# Altium PCB roverServoController.PcbDoc
Units mm, origin at the board's own origin, x right, y up, seen from the top; angles counter-clockwise.
Board outline 60.2 x 40.2 mm, 4 copper layers (Top Layer, Int1 (GND), Int2 (PWR), Bottom Layer), stack 1.585 mm thick; 64 components, 36 nets, 257 pads, 1 vias.
Unrouted connection lines stored in the file: 161.
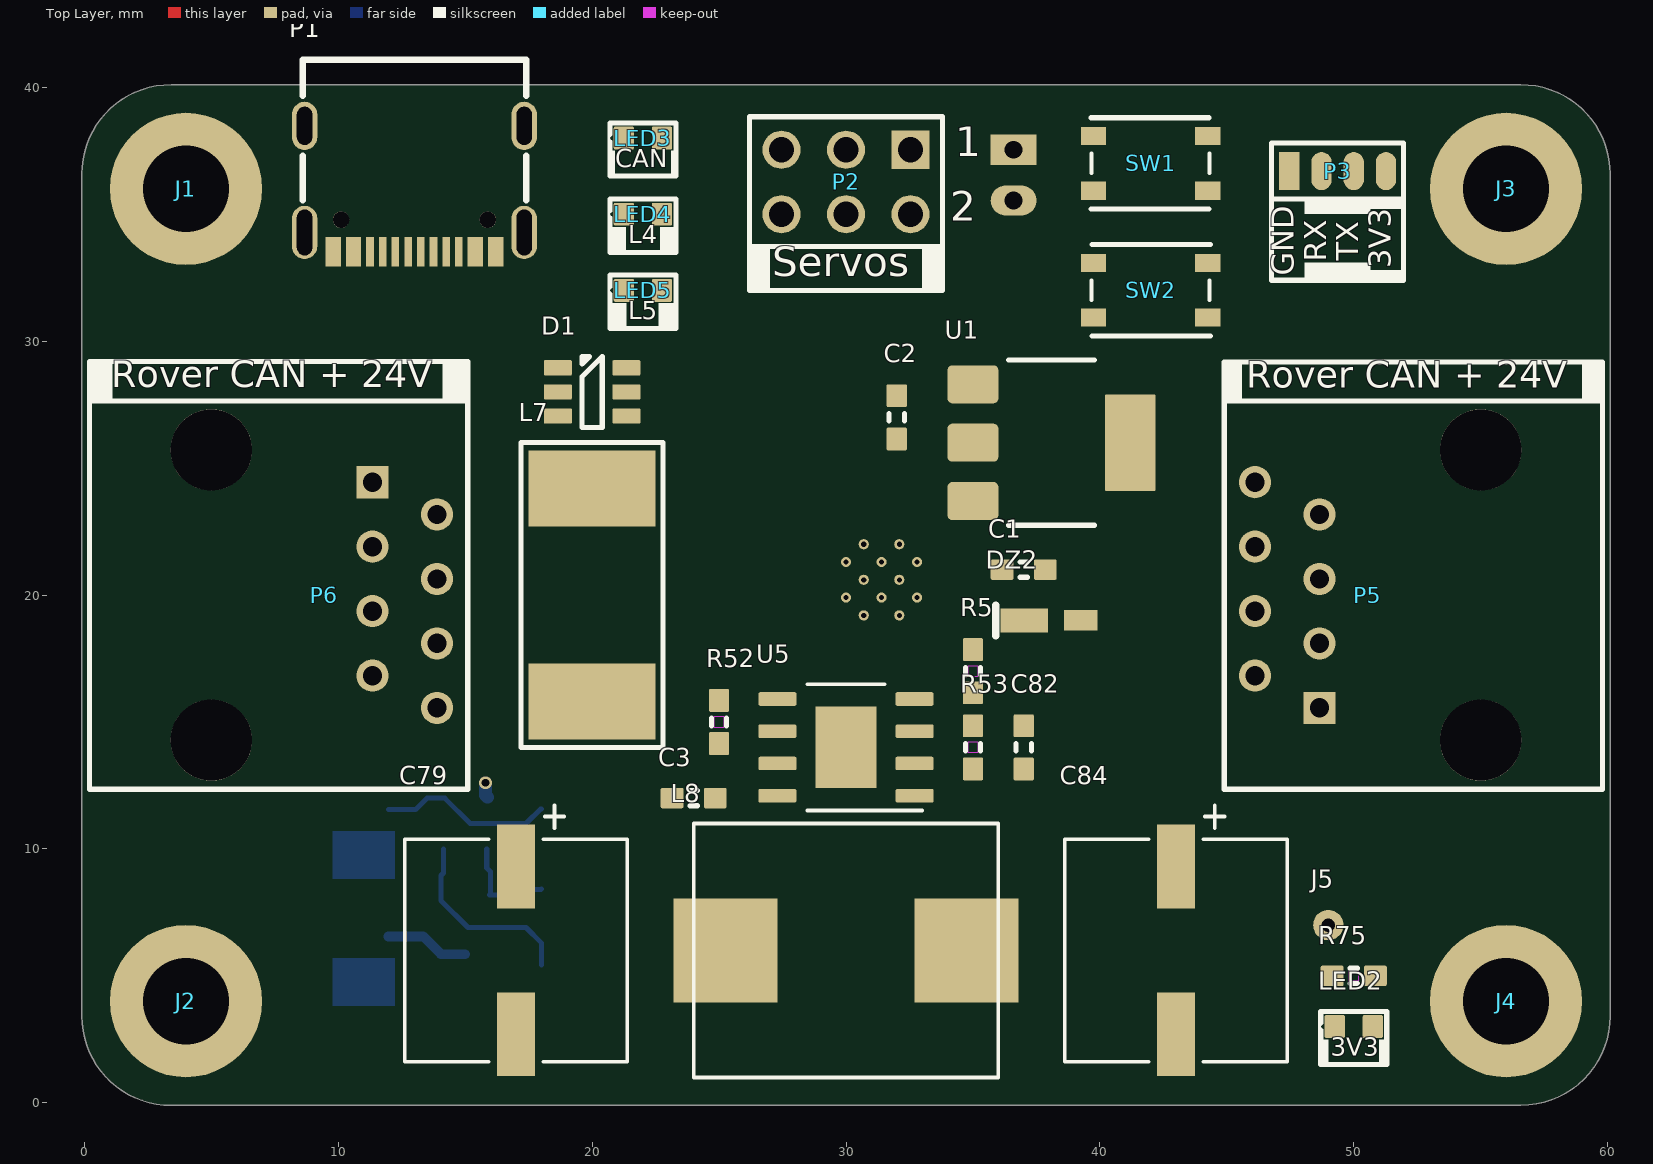
[diagram p0: Top Layer view]
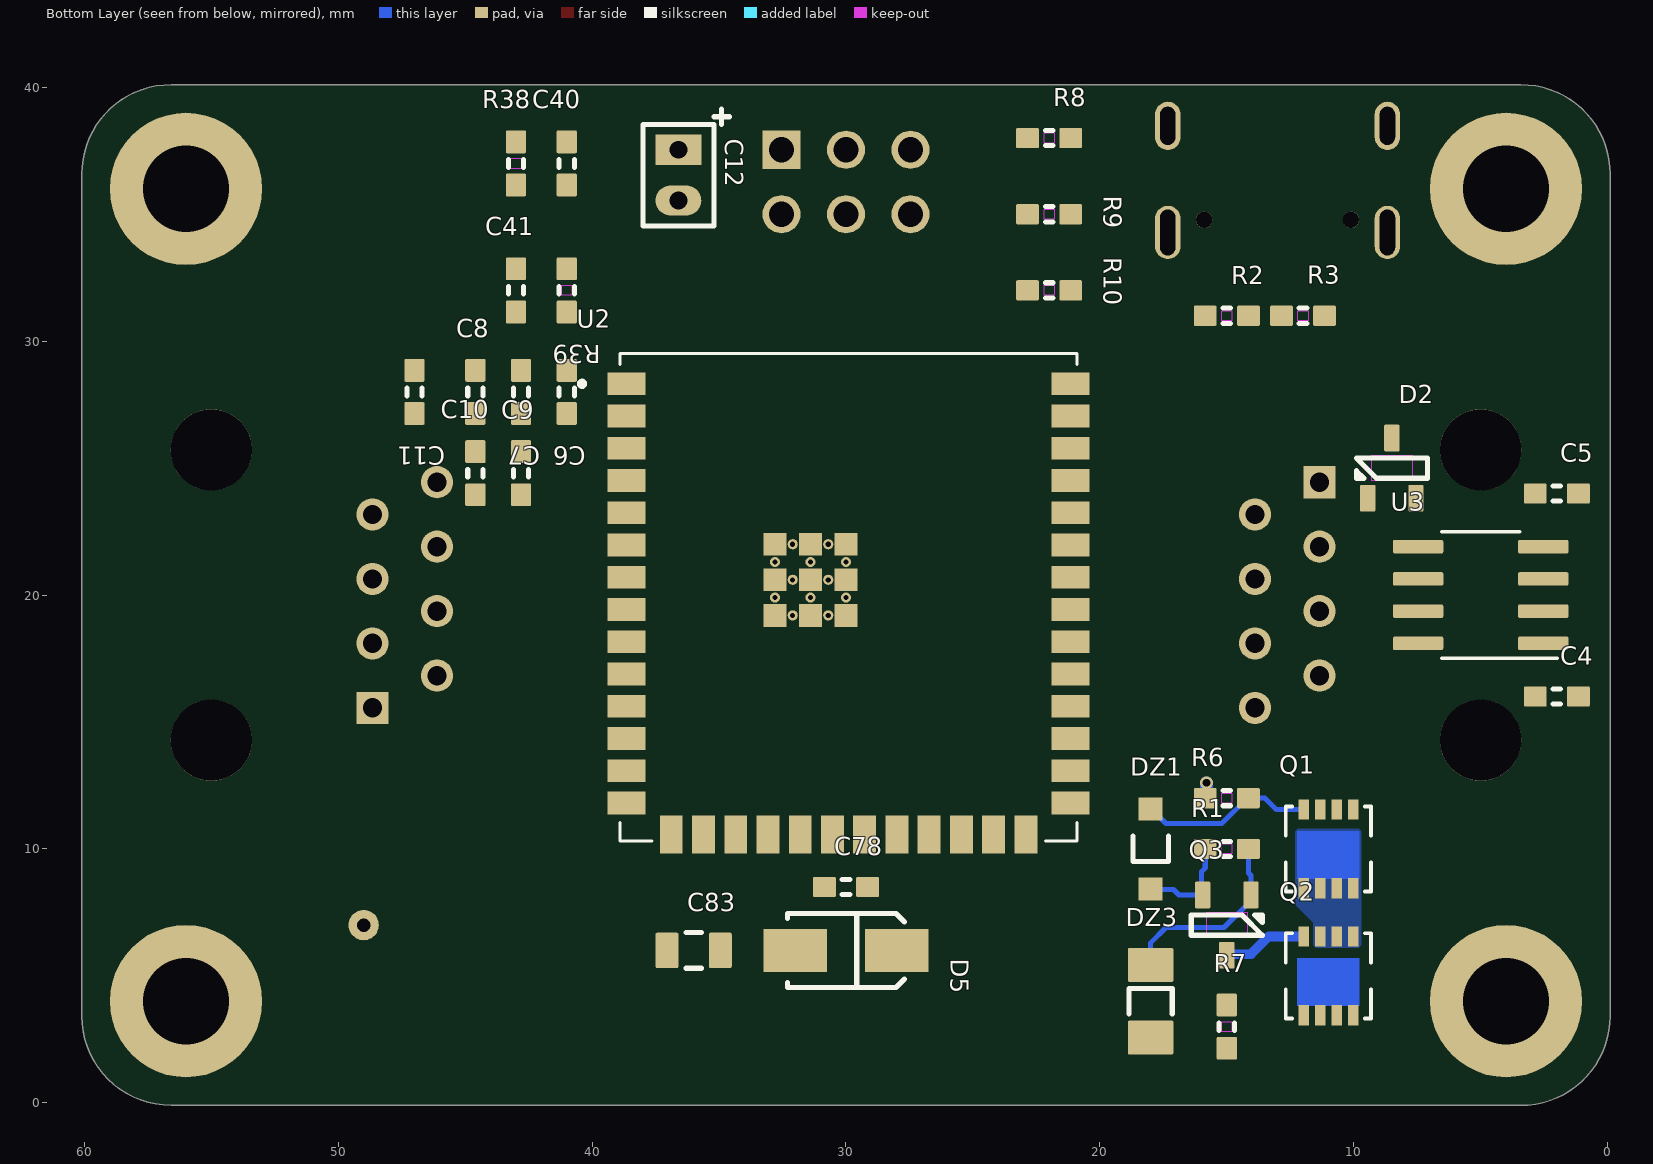
[diagram p1: Bottom Layer view, seen from below]

## Layer stack, top to bottom
Top Solder: solder mask 0.035, SM-001, Dk 4
Top Layer: signal copper 0.035
Dielectric 2: prepreg 0.21, PP-017, Dk 4.6
Int1 (GND): signal copper 0.015
Dielectric 3: core 1.065, Core-039, Dk 4.6
Int2 (PWR): signal copper 0.015
Dielectric 4: prepreg 0.21, PP-017, Dk 4.6
Bottom Layer: signal copper 0.035
Bottom Solder: solder mask 0.035, SM-001, Dk 4

## Board outline
-0.1,3.414 -0.1,36.586 cw(c3.414,36.586) 3.414,40.1 56.586,40.1 cw(c56.586,36.586) 60.1,36.586 60.1,3.414 cw(c56.586,3.414) 56.586,-0.1 4,-0.1 3.414,-0.1 cw(c3.414,3.414)

## Design rules (kind name [scope] priority, off if disabled: settings)
Clearance Clearance_Power [InNetClass('Power')] p1: gap=0.127 ignorepadtopadclearanceinfootprint=FALSE
Clearance Clearance_signal [All] p2: gap=0.125 ignorepadtopadclearanceinfootprint=FALSE
ComponentClearance [All] p1 off: gap=0.254 collisioncheckmode=3 verticalgap=0.254 showdistances=FALSE
DiffPairsRouting eth_100 [Not InDifferentialPair('USB')] p1: maxlimit=0.254 minlimit=0.127 mostfreqgap=0.254 toplayer_maxgap=0.127 toplayer_prefgap=0.127 toplayer_minwidth=0.125 toplayer_maxwidth=0.125 toplayer_prefwidth=0.125 bottomlayer_maxgap=0.127 bottomlayer_prefgap=0.127 bottomlayer_minwidth=0.125 bottomlayer_maxwidth=0.125 bottomlayer_prefwidth=0.125 impedanceprofiledriven=TRUE impedanceprofileid={BED762A8-9934-435E-9BAB-1C0AACEE0ECA} impedanceprofilevalue=100.000000 maxuncoupledlength=12.7
DiffPairsRouting USB_diff [InDifferentialPair('USB') or InDifferentialPair('USB_ESP')] p2: maxlimit=0.254 minlimit=0.127 mostfreqgap=0.254 toplayer_maxgap=0.127 toplayer_prefgap=0.127 toplayer_minwidth=0.182 toplayer_maxwidth=0.182 toplayer_prefwidth=0.182 bottomlayer_maxgap=0.127 bottomlayer_prefgap=0.127 bottomlayer_minwidth=0.182 bottomlayer_maxwidth=0.182 bottomlayer_prefwidth=0.182 impedanceprofiledriven=TRUE impedanceprofileid={FA6609CF-BA32-4F74-B84B-CE5609EF71AF} impedanceprofilevalue=90.000000 maxuncoupledlength=12.7
HoleSize [All] p1 off: absolutevalues=TRUE maxlimit=2.54 minlimit=0.025 maxpercent=80.000 minpercent=20.000
MinimumSolderMaskSliver [All] p1 off: minsoldermaskwidth=0.254
PasteMaskExpansion [All] p1 off: expansion=0
PolygonConnect PolygonConnect_Power [InNetClass('Power')] p1: connectstyle=Direct reliefconductorwidth=0.254 reliefentries=4 polygonreliefangle="90 Angle" airgapwidth=0.254
PolygonConnect PolygonConnectGND [All vs InNet('GND') AND IsNamedPolygon('GND_L01_Plane')] p2: thpad.connectstyle=Relief thpad.reliefconductorwidth=0.4 thpad.reliefentries=4 thpad.polygonreliefangle="90 Angle" thpad.airgapwidth=0.18 smdpad.connectstyle=Relief smdpad.reliefconductorwidth=0.4 smdpad.reliefentries=4 smdpad.polygonreliefangle="90 Angle" smdpad.airgapwidth=0.18 via.connectstyle=Direct via.reliefconductorwidth=0.254 via.reliefentries=4 via.polygonreliefangle="90 Angle" via.airgapwidth=0.254
PolygonConnect [All] p3: connectstyle=Direct reliefconductorwidth=0.254 reliefentries=4 polygonreliefangle="90 Angle" airgapwidth=0.254
RoutingVias [All] p1: holewidth=0.3 width=0.5 viastyle="Through Hole" minholewidth=0.15 minwidth=0.25 maxholewidth=1 maxwidth=1.3
SilkToSolderMaskClearance [IsPad] p1 off: minsilkscreentomaskgap=0.254 clearancetoexposedcopper=TRUE
SolderMaskExpansion [All] p1 off: expansion=0.102 istentingtop=FALSE
Width Width_Power(5A) [InNetClass('Power')] p1: maxlimit=2 minlimit=0.2 preferedwidth=1.25
Width Width_signal [All] p2: maxlimit=1 minlimit=0.1 preferedwidth=0.2 minimp=50.000000 maximp=50.000000 favimp=50.000000
24 further rules are at their usual default settings.

## Classes and differential pairs
component class Power: C1 C2 C3 C78 C79 C82 C83 C84 D5 DZ1 DZ2 DZ3 J5 L7 L8 LED2 P5 P6 Q1 Q2 Q3 R1 R5 R6 R7 R52 R53 R75 U1 U5
component class ESP32: C4 C5 C6 C7 C8 C9 C10 C11 C12 C40 C41 D1 D2 J1 J2 J3 J4 LED3 LED4 LED5 P1 P2 P3 R2 R3 R8 R9 R10 R38 R39 SW1 SW2 U2 U3
net class Power: 5V 24V NetC78_1 NetDZ1_2 NetL7_2

## Components (designator, comment, footprint, x,y, rotation, side; value= is the part's Value field where it differs from the comment)
C1 "Capacitor-0603-10uF-10V-X5R" CAPACITOR-0603 37,21 r180 top value=10uF
C2 "Capacitor-0603-10uF-10V-X5R" CAPACITOR-0603 32,27 r270 top value=10uF
C3 "Capacitor-0603-0.1uF-50V-X7R" CAPACITOR-0603 24,12 r0 top value=0.1uF
C4 "Capacitor-0603-0.1uF-50V-X7R" CAPACITOR-0603 2,16 r180 bottom value=0.1uF
C5 "Capacitor-0603-10uF-10V-X5R" CAPACITOR-0603 2,24 r180 bottom value=10uF
C6 "Capacitor-0603-0.1uF-50V-X7R" CAPACITOR-0603 41,28 r270 bottom value=0.1uF
C7 "Capacitor-0603-0.1uF-50V-X7R" CAPACITOR-0603 42.8,28 r270 bottom value=0.1uF
C8 "Capacitor-0603-0.1uF-50V-X7R" CAPACITOR-0603 44.6,28 r270 bottom value=0.1uF
C9 "Capacitor-0603-10uF-10V-X5R" CAPACITOR-0603 42.8,24.8 r90 bottom value=10uF
C10 "Capacitor-0603-10uF-10V-X5R" CAPACITOR-0603 44.6,24.8 r90 bottom value=10uF
C11 "Capacitor-0603-10uF-10V-X5R" CAPACITOR-0603 47,28 r270 bottom value=10uF
C12 "CAP ALUM 100UF 20% 25V RADIAL SIDE" "CAPACITOR-Aluminium-5x11mm-2mmPitch - SIDE" 36.6,36.54 r180 bottom value=100uF
C40 "Capacitor-0603-1uF-25V-X5R" CAPACITOR-0603 41,37 r270 bottom value=1uF
C41 "Capacitor-0603-0.1uF-50V-X7R" CAPACITOR-0603 43,32 r90 bottom value=0.1uF
C78 "Capacitor-0603-10nF-50V-X7R" CAPACITOR-0603 30,8.5 r0 bottom value=10nF
C79 "CAP ALUM 100UF 20% 25V SMD" CAP_J-V_8X10P5_RUB 17,6 r270 top value=100uF
C82 "Capacitor-0603-82pF-50V-C0G" CAPACITOR-0603 37,14 r270 top value=82pF
C83 "Capacitor-0805-22uF-25V-X5R" CAPACITOR-0805 36,6 r0 bottom value=22uF
C84 "CAP ALUM 220UF 20% 35V SMD" CAP_J-V_8X10P5_RUB 43,6 r270 top value=220uF
D1 "NUP4301MR6T1G" SOT-23-6 20,28 r270 top
D2 "ESDCAN24-2BLY" SOT-23-3 8.5,25 r180 bottom
D5 "CDBA540-HF" SMA/DO-214AC 30,6 r180 bottom
DZ1 "BZT52C6V2-TP" SOD-123 18,10 r270 bottom
DZ2 "MSS1P3L-M3/89A" DO-219AD 38,19 r0 top
DZ3 "MMSZ5254B-TP" SOD-123F 18,4 r90 bottom
J1 "hole" HOLE-3.40MM-M3-8MMEYELET 4,36 r0 top
J2 "hole" HOLE-3.40MM-M3-8MMEYELET 4,4 r0 top
J3 "hole" HOLE-3.40MM-M3-8MMEYELET 56,36 r0 top
J4 "hole" HOLE-3.40MM-M3-8MMEYELET 56,4 r0 top
J5 "hole" HOLE-0.53MM 49,7 r0 top
L7 "3404.2419.11" 2-SMD-Fuse 20,20 r270 top
L8 "104CDMCCDS-220MC" "Inductor_22UH 5A" 30,6 r0 top value=22uH
LED2 "3147-B1911NG--20D000214U1930CT-ND" LED-0603-2PIN-SILKSCREEN 50,3 r0 top
LED3 "3147-B1931NB--20C007614U1930CT-ND" LED-0603-2PIN-SILKSCREEN 22,38 r0 top
LED4 "3147-B1931NB--20C007614U1930CT-ND" LED-0603-2PIN-SILKSCREEN 22,35 r0 top
LED5 "3147-B1931NB--20C007614U1930CT-ND" LED-0603-2PIN-SILKSCREEN 22,32 r0 top
P1 "USB4105-GF-A" USB-C 13,36 r180 top
P2 "6pos-TH-2.54mm" HDR2X3 30,37.54 r180 top
P3 "4pos-SMD-1.27mm" HDR1X4-SMD-50mils 49.365,36.7 r0 top
P5 "RJ45 UnShield" AMPHENOL_54602-908LF 55,20 r90 top
P6 "RJ45 UnShield" AMPHENOL_54602-908LF 5,20 r270 top
Q1 "AONR21307" DFN8_3x3_Power 11,10 r270 bottom
Q2 "AONR21307" DFN8_3x3_Power 11,5 r270 bottom
Q3 "SSM3J332R" SOT-23-3 15,7 r0 bottom
R1 "SMT resistor" Resistor-0603 15,10 r0 bottom value=10k
R2 "Resistor-0603-5.1k" RESISTOR-0603 15,31 r0 bottom value=DNI
R3 "Resistor-0603-5.1k" RESISTOR-0603 12,31 r180 bottom value=DNI
R5 "SMT resistor" Resistor-0603 35,17 r270 top value=31.6k
R6 "SMT resistor" Resistor-0603 15,12 r180 bottom value=10k
R7 "SMT resistor" Resistor-0603 15,3 r90 bottom value=10k
R8 "SMT resistor" Resistor-0603 22,38 r180 bottom value=1k
R9 "SMT resistor" Resistor-0603 22,35 r180 bottom value=1k
R10 "SMT resistor" Resistor-0603 22,32 r180 bottom value=1k
R38 "SMT resistor" Resistor-0603 43,37 r90 bottom value=10k
R39 "SMT resistor" Resistor-0603 41,32 r270 bottom value=10k
R52 "SMT resistor" Resistor-0603 25,15 r270 top value=10k
R53 "SMT resistor" Resistor-0603 35,14 r270 top value=100k
R75 "SMT resistor" Resistor-0603 50,5 r180 top value=1k
SW1 "PTS815 SJM 250 SMTR LFS" "SW4_PTS815 SJM 250 SMTR LFS_CNK" 42,37 r270 top
SW2 "PTS815 SJM 250 SMTR LFS" "SW4_PTS815 SJM 250 SMTR LFS_CNK" 42,32 r90 top
U1 "NCV1117ST33T3G" SOT-223-3/TO-261-3S 35,26 r270 top
U2 "ESP32-S3-WROOM-1U" ESP32-S3-WROOM-1U 29.9,19.91 r180 bottom
U3 "SN65HVD232DR" SOIC-8 5,20 r90 bottom
U5 "RT6285GSP" SOIC-8-EXPOSED-PAD 30,14 r90 top

## Footprints (in the part's own frame and the unit in brackets; to place one, negate y for a bottom-side part, rotate by r counter-clockwise, add the part's x,y. Pads: shape width x height; smd on the part's side, far side on the other; paste and mask are expansions set on the pad)
2-SMD-Fuse [mm]
  rect 3x5 smd: 1(-4.2,0) 2(4.2,0)
  silkscreen extent -6,-2.8 6,2.8, body extent -5.6,-2.09 5.7,2.11, height 4.02
AMPHENOL_54602-908LF [mm] "RJ45"
  rect 1.268x1.268 / inner round 1.268 / far side rect 1.268x1.268 hole 0.76: 1(-4.445,6.35)
  round 1.268 hole 0.76: 2(-3.175,8.89) 3(-1.905,6.35) 4(-0.635,8.89) 5(0.635,6.35) 6(1.905,8.89) 7(3.175,6.35) 8(4.445,8.89)
  round 3.2 hole 3.2 unplated: ""(-5.715,0) ""(5.715,0)
  silkscreen extent -7.65,-4.8 7.65,10.1, body extent -7.65,-7.62 7.65,10.12, height 12.7
CAP_J-V_8X10P5_RUB [mil]
  rect 130x59 smd paste+0: 1(-130,0) 2(130,0)
  silkscreen extent -225,-173 173,173, body extent -175,-167 175,167, height 415
CAPACITOR-0603 [mm] "Metric 1608, EIA 0603. Per Yageo Product Specification V2.2"
  rrect15% 0.9x0.8 smd: 1(-0.85,0) 2(0.85,0)
  Top Layer pour cut-out: -0.2,0.2 0.2,0.2 0.2,-0.2 -0.2,-0.2
  silkscreen extent -0.15,-0.3 0.15,0.3, body extent -0.93,-0.41 0.93,0.41, height 0.81
CAPACITOR-0805 [mm] "Metric 2012, EIA 0805, Per Yageo Product Specification V2.2"
  rrect15% 0.9x1.4 smd: 1(-1.05,0) 2(1.05,0)
  silkscreen extent -0.3,-0.7 0.3,0.7, body extent -1.09,-0.64 1.09,0.64, height 1.26
"CAPACITOR-Aluminium-5x11mm-2mmPitch - SIDE" [mm] "5mm dia x 11mm height Capacitor"
  rect 1.8x1.2 hole 0.7: 1(0,1)
  oval 1.8x1.2 hole 0.7: 2(0,-1)
  silkscreen extent -1.4,-2 2,2.6, body extent -15.15,-2.69 0.15,2.8, height 6.35
DFN8_3x3_Power [mm]
  rect 0.8x0.42 smd paste+0 mask+0: 1(-1.549,0.975) 2(-1.549,0.325) 3(-1.549,-0.325) 4(-1.549,-0.975)
  rect 0.813x0.42 smd paste+0 mask+0: 5(1.549,-0.975) 6(1.549,-0.325) 7(1.549,0.325) 8(1.549,0.975)
  Top Layer region: -0.686,-1.219 -0.686,1.219 1.182,1.219 1.182,-1.219
  silkscreen extent -1.68,-1.68 1.68,1.68, body extent -1.58,-1.58 1.58,1.58, height 0.75
DO-219AD [mil]
  rect 73x37 smd paste+0 mask+0: 1(-38.5,0)
  rect 52x32 smd paste+0 mask+0: 2(49,0)
  silkscreen extent -83,-24 -83,24, body extent -53,-27 53,27, height 29
ESP32-S3-WROOM-1U [mm]
  rect 1.5x0.9 smd: 1(-8.75,8.41) 2(-8.75,7.14) 3(-8.75,5.87) 4(-8.75,4.6) 5(-8.75,3.33) 6(-8.75,2.06) 7(-8.75,0.79) 8(-8.75,-0.48) 9(-8.75,-1.75) 10(-8.75,-3.02) 11(-8.75,-4.29) 12(-8.75,-5.56) 13(-8.75,-6.83) 14(-8.75,-8.1) 27(8.75,-8.1) 28(8.75,-6.83) 29(8.75,-5.56) 30(8.75,-4.29) 31(8.75,-3.02) 32(8.75,-1.75) 33(8.75,-0.48) 34(8.75,0.79) 35(8.75,2.06) 36(8.75,3.33) 37(8.75,4.6) 38(8.75,5.87) 39(8.75,7.14) 40(8.75,8.41)
  rect 0.9x1.5 smd: 15(-6.985,-9.35) 16(-5.715,-9.35) 17(-4.445,-9.35) 18(-3.175,-9.35) 19(-1.905,-9.35) 20(-0.635,-9.35) 21(0.635,-9.35) 22(1.905,-9.35) 23(3.175,-9.35) 24(4.445,-9.35) 25(5.715,-9.35) 26(6.985,-9.35)
  rect 0.9x0.9 smd: 41(-2.9,-0.71) 41(-2.9,0.69) 41(-2.9,2.09) 41(-1.5,-0.71) 41(-1.5,0.69) 41(-1.5,2.09) 41(-0.1,-0.71) 41(-0.1,0.69) 41(-0.1,2.09)
  round 0.4 hole 0.2 mask+0: 41(-2.9,-0.01) 41(-2.9,1.39) 41(-2.2,-0.71) 41(-2.2,0.69) 41(-2.2,2.09) 41(-1.5,-0.01) 41(-1.5,1.39) 41(-0.8,-0.71) 41(-0.8,0.69) 41(-0.8,2.09) 41(-0.1,-0.01) 41(-0.1,1.39)
  silkscreen extent -10.6,-9.6 9,9.6, body extent -9,-9.6 9,9.6, height 3.35
HDR1X4-SMD-50mils [mm] "Connector; Header; 4 Positions 50mils"
  rect 0.8x1.5 smd: 1(-1.905,0)
  oval 0.8x1.5 smd: 2(-0.635,0) 3(0.635,0) 4(1.905,0)
  silkscreen extent -2.6,-1.1 2.6,1.1
HDR2X3 [mm] "Connector; Header; 2 Position"
  rect 1.5x1.5 hole 1: 1(-2.54,0)
  round 1.5 hole 1: 2(0,0) 3(2.54,0) 4(2.54,2.54) 5(0,2.54) 6(-2.54,2.54)
  silkscreen extent -3.8,-1.3 3.8,3.81, body extent -3.81,-10.94 3.81,2.82, height 5.54
HOLE-0.53MM [mm] "Hole 0.53mm"
  round 1.2 hole 0.53: 1(0,0)
HOLE-3.40MM-M3-8MMEYELET [mm] "Hole 3.40mm with round pad for eyelet"
  round 6 hole 3.4: 1(0,0)
"Inductor_22UH 5A" [mm]
  rect 4.1x4.1 smd: 1(-4.75,0) 2(4.75,0)
  silkscreen extent -6,-5 6,5, body extent -5,-5 5,5, height 3.8
LED-0603-2PIN-SILKSCREEN [mm] "Metric 1608, EIA 0603. Per Yageo Product Specification V2.2"
  rrect15% 0.8x0.9 smd: 1(-0.75,0) 2(0.75,0)
  Top Layer pour cut-out: -0.35,0.45 0.35,0.45 0.35,-0.45 -0.35,-0.45
  silkscreen extent -1.35,-1.5 1.3,0.6, body extent -0.8,-0.4 0.8,0.4, height 0.8
Resistor-0603 [mm] "Metric 1608, EIA 0603 Drawn per Yageo \"Chip resistors Mounting\" rev 10"
  rrect15% 0.9x0.8 smd: 1(-0.85,0) 2(0.85,0)
  Top Layer pour cut-out: -0.2,0.2 0.2,0.2 0.2,-0.2 -0.2,-0.2
  Top Layer keep-out region: -0.2,0.2 0.2,0.2 0.2,-0.2 -0.2,-0.2
  silkscreen extent -0.15,-0.3 0.15,0.3, body extent -0.8,-0.4 0.8,0.4, height 0.55
RESISTOR-0603 [mm] "Metric 1608, EIA 0603 Drawn per Yageo \"Chip resistors Mounting\" rev 10"
  rrect15% 0.9x0.8 smd: 1(-0.85,0) 2(0.85,0)
  Top Layer pour cut-out: -0.2,0.2 0.2,0.2 0.2,-0.2 -0.2,-0.2
  Top Layer keep-out region: -0.2,0.2 0.2,0.2 0.2,-0.2 -0.2,-0.2
  silkscreen extent -0.15,-0.3 0.15,0.3, body extent -0.8,-0.4 0.8,0.4, height 0.55
SMA/DO-214AC [mm] "SMA, DO-214AC. From Diode DS19005 rev 16-2"
  rect 2.5x1.7 smd: 1(-2,0) 2(2,0)
  silkscreen extent -2.3,-1.46 2.3,1.46, body extent -2.55,-1.33 2.55,1.33, height 2.08
SOD-123 [mm] "SOD-123. From Diodes DDZ6V2B-7 datasheet"
  rect 0.9x0.95 smd: 1(-1.575,0) 2(1.575,0)
  silkscreen extent -0.5,-0.7 0.5,0.7, body extent -1.85,-0.8 1.85,0.8, height 1.27
SOD-123F [mm] "SOD-123F from https://www.diodes.com/assets/Package-Files/SOD123F.pdf on 2017-03-16"
  rrect10% 1.34x1.8 smd: 1(-1.43,0) 2(1.43,0)
  silkscreen extent -0.5,-0.85 0.5,0.85, body extent -1.85,-0.85 1.9,0.85, height 1.22
SOIC-8 [mil] "8-Lead Plastic Small Outline, 0.15in pitch,  LTC DWG # 05-08-1610 Rev G"
  rrect25% 21x78 smd: 1(-75,-97) 2(-25,-97) 3(25,-97) 4(75,-97) 5(75,97) 6(25,97) 7(-25,97) 8(-75,97)
  silkscreen extent -98,-118 98,60, body extent -98,-122 98,122, height 69
SOIC-8-EXPOSED-PAD [mm] "8-Lead Plastic Small Outline, 0.15in pitch,  LTC DWG # 05-08-1610 Rev G"
  rrect25% 0.533x1.5 smd: 1(-1.905,-2.7) 2(-0.635,-2.7) 3(0.635,-2.7) 4(1.905,-2.7) 5(1.905,2.7) 6(0.635,2.7) 7(-0.635,2.7) 8(-1.905,2.7)
  rect 3.2x2.4 smd: 9(0,0)
  silkscreen extent -2.49,-3 2.49,1.52, body extent -2.5,-3.1 2.5,3.1, height 1.75
SOT-23-3 [mm] "SOT23-3, from TI DBZ (R-PDSO-G3)"
  rrect15% 0.6x1.05 smd: 1(-0.95,-1.185) 2(0.95,-1.185) 3(0,1.185)
  Top Layer keep-out region: -0.8,0.5 0.8,0.5 0.8,-0.5 -0.8,-0.5
  silkscreen extent -1.4,-0.4 1.4,0.4, body extent -1.45,-1.21 1.45,1.21, height 0.98
SOT-23-6 [mm] "SOT23-6, from TI DDC (R-PDSO-G6)"
  rrect15% 0.6x1.1 smd: 1(-0.95,-1.35) 2(0,-1.35) 3(0.95,-1.35) 4(0.95,1.35) 5(0,1.35) 6(-0.95,1.35)
  silkscreen extent -1.4,-0.4 1.4,0.4, body extent -1.5,-1.37 1.5,1.38, height 1.1
SOT-223-3/TO-261-3S [mm] "TO-261-3 / SOT-223-3 from Infineon IPN80R600P7 Datasheet, rev 2,1"
  rrect25% 1.5x2 smd: 1(-2.3,0) 2(0,0) 3(2.3,0)
  rrect5% 3.8x2 smd: 4(0,6.2)
  silkscreen extent -3.25,1.4 3.25,4.78, body extent -3.25,-0.37 3.25,6.57, height 1.64
"SW4_PTS815 SJM 250 SMTR LFS_CNK" [mm]
  rect 0.711x0.991 smd paste+0: 1(1.075,2.25) 2(1.075,-2.25) 3(-1.075,2.25) 4(-1.075,-2.25)
  silkscreen extent -1.8,-2.35 1.8,2.32, body extent -1.83,-2.32 1.83,2.32, height 3
USB-C [mm]
  oval 1x1.9 hole 0.6 slot 1.5 at 90 deg: 13(-4.325,-2.481) 13(4.325,-2.481)
  oval 1x2.1 hole 0.6 slot 1.8 at 90 deg: 13(-4.325,1.719) 13(4.325,1.719)
  rect 0.6x1.15 smd mask+0.08: A1B12(-3.2,2.481) A4B9(-2.4,2.481) B1A12(3.2,2.481) B4A9(2.4,2.481)
  rect 0.3x1.15 smd mask+0.08: A5(-1.25,2.481) A6(-0.25,2.481) A7(0.25,2.481) A8(1.25,2.481) B5(1.75,2.481) B6(0.75,2.481) B7(-0.75,2.481) B8(-1.75,2.481)
  round 0.65 hole 0.65 unplated: ""(-2.89,1.219) ""(2.89,1.219)
  silkscreen extent -4.4,-5.08 4.4,0.44, body extent -4.47,-5.08 4.47,2.52, height 3.28

## Part data
C1 C2 C5 C9 C10 C11: "10 µF ±20% 10V Ceramic Capacitor X5R 0603 (1608 Metric)", Package / Case="Metric 1608 , EIA 0603", Supplier Part Number 1=4713-GMC10X5R106M10NTCT-ND, Volt=10V, Mounted=Yes, Precision=20%, Supplier 1=Digikey
C3 C4 C6 C7 C8 C41: Package / Case="Metric 1608, EIA 0603", Supplier Part Number 1=1276-1935-2-ND, Volt=50V, Mounted=Yes, Precision=X7R-10%, Supplier 1=Digi-Key, Supplier 2=Digi-Key, Supplier Part Number 2=1276-1934-2-ND
C12: library part Capacitor-100uF-25V-Side, "CAP ALUM 100UF 20% 25V RADIAL", Supplier Part Number 1=399-6102-ND, Volt=25V, Mounted=Yes, Precision=20%, Supplier 1=Digi-Key, Supplier 2=Digi-Key
C40: Package / Case="Metric 1608, EIA 0603", Supplier Part Number 1=1276-1859-2-ND, Volt=25V, Mounted=Yes, Precision=X5R-10%, Supplier 1=Digi-Key, Supplier 2=Digi-Key, Supplier Part Number 2=1276-1942-2-ND
C78: Package / Case="Metric 1608 , EIA 0603", Supplier Part Number 1=490-4778-1-ND, Volt=50V, Mounted=Yes, Precision=X7R-10%, Supplier 1=Digikey
C79: library part Capacitor-100uF-50V-SMD, "CAP ALUM 100UF 20% 50V SMD", Supplier Part Number 1=1189-1651-1-ND, Volt=50V, Mounted=Yes, Precision=20%, Supplier 1=Digi-Key, Supplier 2=Digi-Key
C82: Package / Case="Metric 1608, EIA 0603", Supplier Part Number 1=478-KGM15ACG1H820JTCT-ND, Volt=50V, Mounted=Yes, Precision=C0G-5%, Supplier 1=Digi-Key, Supplier 2=Digi-Key
C83: Package / Case="Metric 2012 , EIA 0805", Supplier Part Number 1=490-12389-1-ND, Volt=25V, Mounted=Yes, Precision=X5R-20%, Supplier 1=Digi-Key, Supplier 2=Digi-Key
C84: library part Capacitor-220uF-35V-SMD, Supplier Part Number 1=1189-1651-1-ND, Volt=35V, Mounted=Yes, Precision=20%, Supplier 1=Digi-Key, Supplier 2=Digi-Key
D1: "4CH Clamp Ipp Tvs Diode Surface Mount SOT23-6 (SC74)", Package / Case=SOT23-6, Supplier Part Number 1=NUP4301MR6T1GOSTR-ND, Volt=70, Mounted=Yes, Supplier 1=Digi-Key
D2: "55V Clamp 6A (8/20µs) Ipp Tvs Diode Surface Mount SOT-23", Package / Case=SOT-23-3, Supplier Part Number 1=5272-ESDCAN24-2BLYCT-ND, Volt=24, Mounted=Yes, Supplier 1=Digi-Key
D5: "DIODE SCHOTTKY 40V 5A SMA", Package / Case=SMA, Supplier Part Number 1=641-1707-1-ND, Volt=40V, Mounted=Yes, Supplier 1=Digi-Key
DZ1: "Zener Diode 6.2 V 200 mW ±6% Surface Mount SOD-123", Package / Case=SOD-123, Supplier Part Number 1=BZT52C13-TPMSCT-ND, Volt=6.2V, Grade=None, Mounted=Yes, Precision=6%, Supplier 1=Digi-Key, Watt=200mW
DZ2: "Diode 30 V 1A Surface Mount MicroSMP (DO-219AD)", Package / Case="DO-214AC, SMA", Supplier Part Number 1=MSS1P3L-M3/89AGICT-ND, Volt=30V, Grade=None, Mounted=Yes, Supplier 1=Digi-Key
DZ3: "DIODE ZENER 27V 500MW SOD123", Package / Case=SOD-123, Supplier Part Number 1=MMSZ5254B-TPMSCT-ND, Volt=27V, Grade=None, Mounted=Yes, Precision=5%, Supplier 1=Digi-Key, Watt=0.5W
J1 J2 J3 J4: library part "Hole 3.40mm M3-Eyelet", "Hole for M3 Bolt with 8mm pad", Mounted=N/A
J5: library part "Hole 0.53mm AWG28-Solid", "Hole for 28 AWG Solid Wire", Mounted=N/A
L7: "2 A 277 V AC 250 V DC Fuse Board Mount (Cartridge Style Excluded) Requires Holder, Surface Mount 2-SMD, Square End Block with Clip", Current=2A, Package / Case=SMD, Supplier Part Number 1=486-2091-ND, Mounted=Yes, Supplier 1=Digi-Key
L8: "FIXED IND 22UH 5A 66 MOHM SMD", Current=5A, Package / Case=SMD, Supplier Part Number 1=308-2498-1-ND, Mounted=Yes, Precision=20%, Supplier 1=Digi-Key
LED2: library part LED_GREEN, "LED GREEN DIFFUSED 0603 SMD", Package / Case="0603 (1608 Metric)", Mounted=Yes, Supplier 1=Digi-Key, Supplier Part Number 1=3147-B1911NG--20D000214U1930CT-ND
LED3 LED4 LED5: library part LED_BLUE, "LED BLUE CLEAR 0603 SMD", Package / Case="0603 (1608 Metric)", Mounted=Yes, Supplier 1=Digi-Key, Supplier Part Number 1=3147-B1931NB--20C007614U1930CT-ND
P1: "CONN RCP USB2.0 TYP C 24P SMD RA / 5A", Package / Case=SMD, Supplier Part Number 1=2073-USB4105-GF-ACT-ND, Volt=N/A, Mounted=Yes, Supplier 1=Digikey
P2: library part "6pos-TH-2.54mm 2x3", "6pos TH 2.54mm Header", Package / Case=TH, Supplier Part Number 1=952-2092-ND, Volt=N/A, Mounted=Yes, Supplier 1=Digi-Key
P3: "4pos SMD 1.27mm", Package / Case=TH, Supplier Part Number 1=N/A, Mounted=Yes, Supplier 1=Digi-Key, Volt=N/A
P5 P6: library part RJ545, "Jack Modular Connector 8p8c (RJ45, Ethernet) 90° Angle (Right) Unshielded Cat3", Package / Case=SMD, Supplier Part Number 1=609-1046-ND, Volt=N/A, HelpURL=https://cdn.amphenol-cs.com/media/wysiwyg/files/drawing/c-bmj-0102.pdf, Mounted=Yes, Supplier 1=Digikey
Q1 Q2: "MOSFET P-CH 30V 24A 8DFN", Current=24A, Package / Case="8-DFN-EP (3x3)", Supplier Part Number 1=785-1796-2-ND, Volt=30V, Mounted=Yes, Supplier 1=Digi-Key
Q3: "P-Channel 30 V 6A (Ta) 1W (Ta) Surface Mount SOT-23F", Current=6A, Package / Case=SOT-523, Supplier Part Number 1=SSM3J332RLFCT-ND, Volt=30V, Mounted=Yes, Supplier 1=Digi-Key
R1 R6 R7 R38 R39: library part Resistor0603-10k, "Resistor0603-10k", Package / Case="Metric 1608, EIA 0603", Supplier Part Number 1=311-10.0KHRTR-ND, Mounted=Yes, Precision=1%, Supplier 1=Digi-Key, Supplier 2=Digi-Key, Supplier 3=Digi-Key, Supplier 4=Digi-Key, Supplier Part Number 2=RMCF0603FT10K0TR-ND, Watt=0.1W
R2 R3: library part Resistor-0603-DNI, "0603 footprint DO NOT INSTALL", Package/Case="Metric 1608 , EIA 0603", Mounted=Yes
R5: library part Resistor-0603-31.6k, "Resistor0603-31.6k", Package / Case="Metric 1608, EIA 0603", Supplier Part Number 1=311-31.6KHRCT-ND, Mounted=Yes, Precision=1%, Supplier 1=Digi-Key, Watt=0.1W
R8 R9 R10 R75: library part Resistor-0603-1k, "Resistor0603-1k", Package / Case="Metric 1608, EIA 0603", Supplier Part Number 1=311-1.00KHRCT-ND, Mounted=Yes, Precision=1%, Supplier 1=Digi-Key, Watt=0.1W
R52: library part Resistor-0603-10k, "Resistor0603-10k", Package / Case="Metric 1608, EIA 0603", Supplier Part Number 1=311-10.0KHRTR-ND, Mounted=Yes, Precision=1%, Supplier 1=Digi-Key, Watt=0.1W
R53: library part Resistor-0603-100k, "Resistor0603-100k", Package / Case="Metric 1608, EIA 0603", Supplier Part Number 1=311-100KHRCT-ND, Mounted=Yes, Precision=1%, Supplier 1=Digi-Key, Watt=0.1W
SW1 SW2: "TACT 4.2 X 3.2, 2.5 MM H, 180GF,", Current=0.05A, Supplier Part Number 1=CKN12215-1-ND, Volt=12V, Mounted=Yes, Supplier 1=Digi-Key
U1: "IC REG LINEAR 3.3V 1A SOT223", Package / Case=SOT223, Supplier Part Number 1=NCP1117ST15T3GOSTR-ND, Mounted=Yes, Supplier 1=Digi-Key
U2: "2.4 GHz Wi-Fi (802.11 b/g/n) and Bluetooth 5 (LE) module", Package=Package, Supplier Part Number 1=1965-ESP32-S3-WROOM-1U-N8R8CT-ND, MF="Espressif Systems", MP=ESP32-S3-WROOM-1U, Supplier 1=Digikey
U3: "1/1 Transceiver Half CANbus 8-SOIC", Package / Case=8-SOIC, Supplier Part Number 1=296-26344-1-ND, HelpURL=https://www.ti.com/lit/ds/symlink/sn65hvd230.pdf?HQS=dis-dk-null-digikeymode-dsf-pf-null-wwe&ts=1723930967656&ref_url=https%253A%252F%252Fwww.ti.com%252Fgeneral%252Fdocs%252Fsuppproductinfo.tsp%253FdistId%253D10%2526gotoUrl%253Dhttps%253A%252F%252Fwww.ti.com%252Flit%252Fgpn%252Fsn65hvd230, Mounted=Yes, Supplier 1=Digikey
U5: "5A Buck Switching Regulator IC Positive Adjustable 1.222V 1 Output 5A 8-SOIC (0.154\", 3.90mm Width) Exposed Pad", Package / Case=8-SOIC-EP, Supplier Part Number 1=1028-RT6285GSPCT-ND, Grade=None, HelpURL=file:///C:/Users/Emile/Downloads/DS6285-00.pdf, Mounted=Yes, Supplier 1=Digi-Key

## Via types
v1: diameter 0.5, hole 0.3, Top Layer to Bottom Layer, tented both sides, 1 vias

## Nets (pads, with @x,y where several pads share a name; then routed paths per layer and width w, separated by ;. In a path a pad name is that pad's centre, name@x,y a point inside that pad or via, vN(x,y) a via of type N, cw(c..) or ccw(c..) an arc to the next point about the centre after c; other vN are vias at no path point)
3V3: C2.2 C4.2 C5.2 C6.2 C7.2 C8.2 C9.2 C10.2 C11.2 P3.4 R38.2 R39.2 U1.2 U1.4 U2.2 U3.3
5V: C12.1 C82.2 C83.2 C84.1 DZ2.2 J5.1 L8.2 P2.2 P2.5 R53.2 R75.2
5V_USB: C1.2 D1.5 DZ2.1 P1.A4B9 P1.B4A9 U1.3
24V: C3.2 C79.1 Q2.5 Q2.6 Q2.7 Q2.8 R52.2 U5.7
24V_RAW: L7.1 P5.5 P5.7 P6.5 P6.7
CAN_H: D2.2 P5.1 P6.1 U3.7
CAN_L: D2.1 P5.2 P6.2 U3.6
CAN_LED: R8.2 U2.25
CAN_RX: U2.30 U3.4
CAN_TX: U2.29 U3.1
CC1: D1.4 P1.A5 R2.2
CC2: D1.3 P1.B5 R3.2
EN: C40.2 R38.1 SW1.1 U2.3
GND: C1.1 C2.1 C3.1 C4.1 C5.1 C6.1 C7.1 C8.1 C9.1 C10.1 C11.1 C12.2 C40.1 C41.1 C79.2 C83.1 C84.2 D1.2 D2.3 D5.1 DZ3.1 J1.1 J2.1 J3.1 J4.1 LED2.1 LED3.1 LED4.1 LED5.1 P1.13 P1.A1B12 P1.B1A12 P2.3 P2.4 P3.1 P5.6 P5.8 P6.6 P6.8 R2.1 R3.1 R5.1 R6.1 R7.1 SW1.3 SW2.3 U1.1 U2.1 U2.40 U2.41 U3.2 U5.6 U5.9 | length 0.6
  Bottom Layer w0.4: R6.1 R6.1@15.881,12.031
  Bottom Layer w0.5: v1(15.8,12.6) 15.8,12.112 R6.1@15.881,12.031
IO0: C41.2 R39.1 SW2.1 U2.27
NetC78_1: C78.1 D5.2 L8.1 U5.8
NetC78_2: C78.2 U5.1
NetC82_1: C82.1 R5.2 R53.1 U5.4
NetDZ1_1: DZ1.1 Q1.4 R6.2 | length 6.9
  Bottom Layer w0.2: Q1.4 13.049,11.549 13.5,12 R6.2 14.2,12 15.2,11 17.4,11 17.975,11.575 DZ1.1
NetDZ1_2: DZ1.2 Q1.5 Q1.6 Q1.7 Q1.8 Q2.1 Q2.2 Q2.3 Q3.2 R1.2 | length 4
  Bottom Layer w0.2: R1.2 15.85,9.25 16,9.1 16,8.235 Q3.2 16.715,8.185 16.717,8.183 16.883,8.183 17.1,8.4 17.975,8.4 DZ1.2
NetDZ3_2: DZ3.2 Q3.1 R1.1 | length 7.6
  Bottom Layer w0.2: R1.1 14.15,9.05 14.05,8.95 Q3.1 14.05,7.96 15.11,6.9 17.4,6.9 18,6.3 DZ3.2
NetL7_2: L7.2 Q1.1 Q1.2 Q1.3
NetLED2_2: LED2.2 R75.1
NetLED3_2: LED3.2 R8.1
NetLED4_2: LED4.2 R9.1
NetLED5_2: LED5.2 R10.1
NetQ2_4: Q2.4 Q3.3 R7.2 | length 3.3
  Bottom Layer w0.381: Q2.4 13.351,6.549 14.048,5.852 Q3.3@15,5.852
NetR9_2: R9.2 U2.24
NetR10_2: R10.2 U2.26
NetR52_1: R52.1 U5.5
RX0: P3.2 U2.36
servo_1: P2.1 U2.11
servo_2: P2.6 U2.23
TX0: P3.3 U2.37
USB_N: D1.6 P1.A7 P1.B7 U2.13
USB_P: D1.1 P1.A6 P1.B6 U2.14
pads on no net: P1. P1.A8 P1.B8 P5. P5.3 P5.4 P6. P6.3 P6.4 SW1.2 SW1.4 SW2.2 SW2.4 U2.4 U2.5 U2.6 U2.7 U2.8 U2.9 U2.10 U2.12 U2.15 U2.16 U2.17 U2.18 U2.19 U2.20 U2.21 U2.22 U2.28 U2.31 U2.32 U2.33 U2.34 U2.35 U2.38 U2.39 U3.5 U3.8 U5.2 U5.3

## Polygon pours and split planes (outlines as drawn)
NetDZ1_2 on Bottom Layer "NETDZ1_2_L04_P000" (solid, remove dead copper, pour order 0): 11.6,7.1 12.3,7.8 12.3,10.7 12.2,10.8 9.8,10.8 9.7,10.7 9.7,6.2 9.8,6.1 11.5,6.1 11.6,6.2

## Silkscreen, mask and mechanical layers (free items; w line width, h text height)
Top Overlay:
  rectangle: 59,27.685 59.8,29.185
  rectangle: 44.9,27.685 45.6,29.185
  region: 33.8,32 33.8,33.7 33,33.7 33,32
  region: 27,32 27,33.7 26.1,33.7 26.1,32
  rectangle: 0.2,27.7 1.1,29.2
  rectangle: 14.1,27.7 15.1,29.2
  region: 48.065,35.3 48.065,35 50.665,35 50.665,35.3
  region: 48.065,35.6 48.065,35.2 51.965,35.2 51.965,35.6
  region: 48.065,33.1 48.065,32.6 50.665,32.6 50.665,33.1
  region: 48.065,32.8 48.065,32.4 51.965,32.4 51.965,32.8
  lines w0.2: 0.2,27.6 0.2,29.2 15.1,29.2 15.1,27.4 ; 26.2,36.3 26.2,32 33.8,32 33.8,36.3 ; 44.9,27.585 44.9,29.185 59.8,29.185 59.8,27.385 ; 46.765,35.7 46.765,32.4 51.965,32.4 51.965,35.9
  text "1" at 34.3,36.898 h2
  text "2" at 34.111,34.358 h2
  text "TX" at 50.48,33.16 h1.5 r90
  text "RX" at 49.21,33.119 h1.5 r90
  text "3V3" at 51.743,32.862 h1.5 r90
  text "GND" at 47.939,32.576 h1.5 r90
  text "Servos" at 27.095,32.161 h2
  text "Rover CAN + 24V" at 1.059,27.824 h1.8
  text "Rover CAN + 24V" at 45.759,27.809 h1.8
Board:
  lines w0.2: 0,31 0,36.586 cw(c3.414,36.586) 3.414,40 56.586,40 cw(c56.586,36.586) 60,36.586 60,33.73 60,3.414 cw(c56.586,3.414) 56.586,0 4,0 3.414,0 cw(c3.414,3.414) 0,3.414 0,31.586

## Text inside footprints (layer, text, board x,y; h text height)
LED2: Top Overlay "3V3" at 49.091,1.622 h1.2
LED3: Top Overlay "CAN" at 20.909,36.617 h1.2
LED4: Top Overlay "L4" at 21.429,33.615 h1.2
LED5: Top Overlay "L5" at 21.433,30.627 h1.2